# EAGLE board Laboratorio 1 (EAGLE 7.6.0)

Size 56.82 x 53.33 mm. Coordinates in mm from the lower left corner, seen from the top.
Outline: 0,0 56.82,0 56.82,53.33 0,53.33 0,0
Copper layers (1*16): Top 0.035mm / dielectric 1.5mm / Bottom 0.035mm
Design rules "default": minimum track width 10mil, minimum drill 24mil, track to track 8mil, track to pad 8mil, pad to pad 8mil, via to via 8mil, smd to smd 8mil, copper to edge 40mil, drill to drill 8mil, minimum pad ring 10mil, minimum via ring 8mil, stop-mask expansion 4mil, vias tented up to drill 0mil, thermal gap 10mil

## Footprints (pad centres in the part's own frame; a part is rotated, then mirrored left to right if it is on the bottom)
DC-POWER = drill 0.889 pad 2.54 octagon: + 0,2.54; - 0,-2.54
2P-2.54-65/35MIL = drill 0.889 pad 1.651 square: 1 0,1.27 | drill 0.889 pad 1.651: 2 0,-1.27
0207/10 = drill 0.813 octagon: 1 -5.08,0; 2 5.08,0

## Placement (x,y rotation side)
Meter IR 1  [DC-POWER]  5,200.58 0 top  (outside the outline)
Meter IR 2  [DC-POWER]  5,213.28 0 top  (outside the outline)
Meter IR 3 - IR 4  [DC-POWER]  5,238.68 0 top  (outside the outline)
Meter IR 5  [DC-POWER]  5,225.98 0 top  (outside the outline)
Meter VR 1  [DC-POWER]  5,73.58 0 top  (outside the outline)
Meter VR 2  [DC-POWER]  5,86.28 0 top  (outside the outline)
Meter VR 3  [DC-POWER]  5,98.98 0 top  (outside the outline)
Meter VR 4  [DC-POWER]  5,124.38 0 top  (outside the outline)
Meter VR 5  [DC-POWER]  5,111.68 0 top  (outside the outline)
PFuente DC  10V  [2P-2.54-65/35MIL]  5,10.08 0 top
PFuente DC1  10V  [2P-2.54-65/35MIL]  5,251.38 0 top  (outside the outline)
R R1  1k‎Ω  [0207/10]  5,137.08 0 top  (outside the outline)
R R3  2.2k‎Ω  [0207/10]  5,149.78 0 top  (outside the outline)
R R5  1.8k‎Ω  [0207/10]  5,187.88 0 top  (outside the outline)
RR1  1k‎Ω  [0207/10]  5,22.78 0 top
RR3  2.2k‎Ω  [0207/10]  5,35.48 0 top
RR4  2.2k‎Ω  [0207/10]  5,48.18 0 top
RR5  1.8k‎Ω  [0207/10]  5,60.88 0 top  (outside the outline)
RR21  3.9k‎Ω  [0207/10]  5,162.48 0 top  (outside the outline)
RR41  2.2k‎Ω  [0207/10]  5,175.18 0 top  (outside the outline)

## Library data of the parts
Meter IR 1 Meter IR 2 Meter IR 3 - IR 4 Meter IR 5 Meter VR 1-Meter VR 5 PFuente DC PFuente DC1 R R1 R R3 R R5 RR1 RR3-RR5 RR21 RR41 = AUTODESK_CIRCUITS_BREADBOARD

## Nets
N$1: Meter VR 1.- Meter VR 2.+ Meter VR 3.+ RR1.2 RR3.1
N$2: Meter VR 5.- PFuente DC.1 RR5.2
N$3: Meter VR 3.- Meter VR 4.+ RR3.2 RR4.1
N$4: Meter VR 1.+ PFuente DC.2 RR1.1
N$5: Meter VR 2.- Meter VR 4.- Meter VR 5.+ RR4.2 RR5.1
N$6: Meter IR 1.- Meter IR 2.+ R R3.1
N$7: Meter IR 3 - IR 4.+ R R3.2
N$8: Meter IR 1.+ R R1.2
N$9: PFuente DC1.2 R R1.1
N$10: R R5.1 RR21.2 RR41.2
N$11: Meter IR 2.- RR21.1
N$12: Meter IR 3 - IR 4.- RR41.1
N$13: Meter IR 5.+ R R5.2
N$14: Meter IR 5.- PFuente DC1.1

## Tracks (layer width: path | path; a pad name or v marks a point on that pad's centre or on a via)
N$1  (4 unrouted)
N$2  (2 unrouted)
N$3  (3 unrouted)
N$4  (2 unrouted)
N$5  (4 unrouted)
N$6  (2 unrouted)
N$7  (1 unrouted)
N$8  (1 unrouted)
N$9  (1 unrouted)
N$10  (2 unrouted)
N$11  (1 unrouted)
N$12  (1 unrouted)
N$13  (1 unrouted)
N$14  (1 unrouted)